# EAGLE board tp34 (EAGLE 6.6.0), part 1 of 2
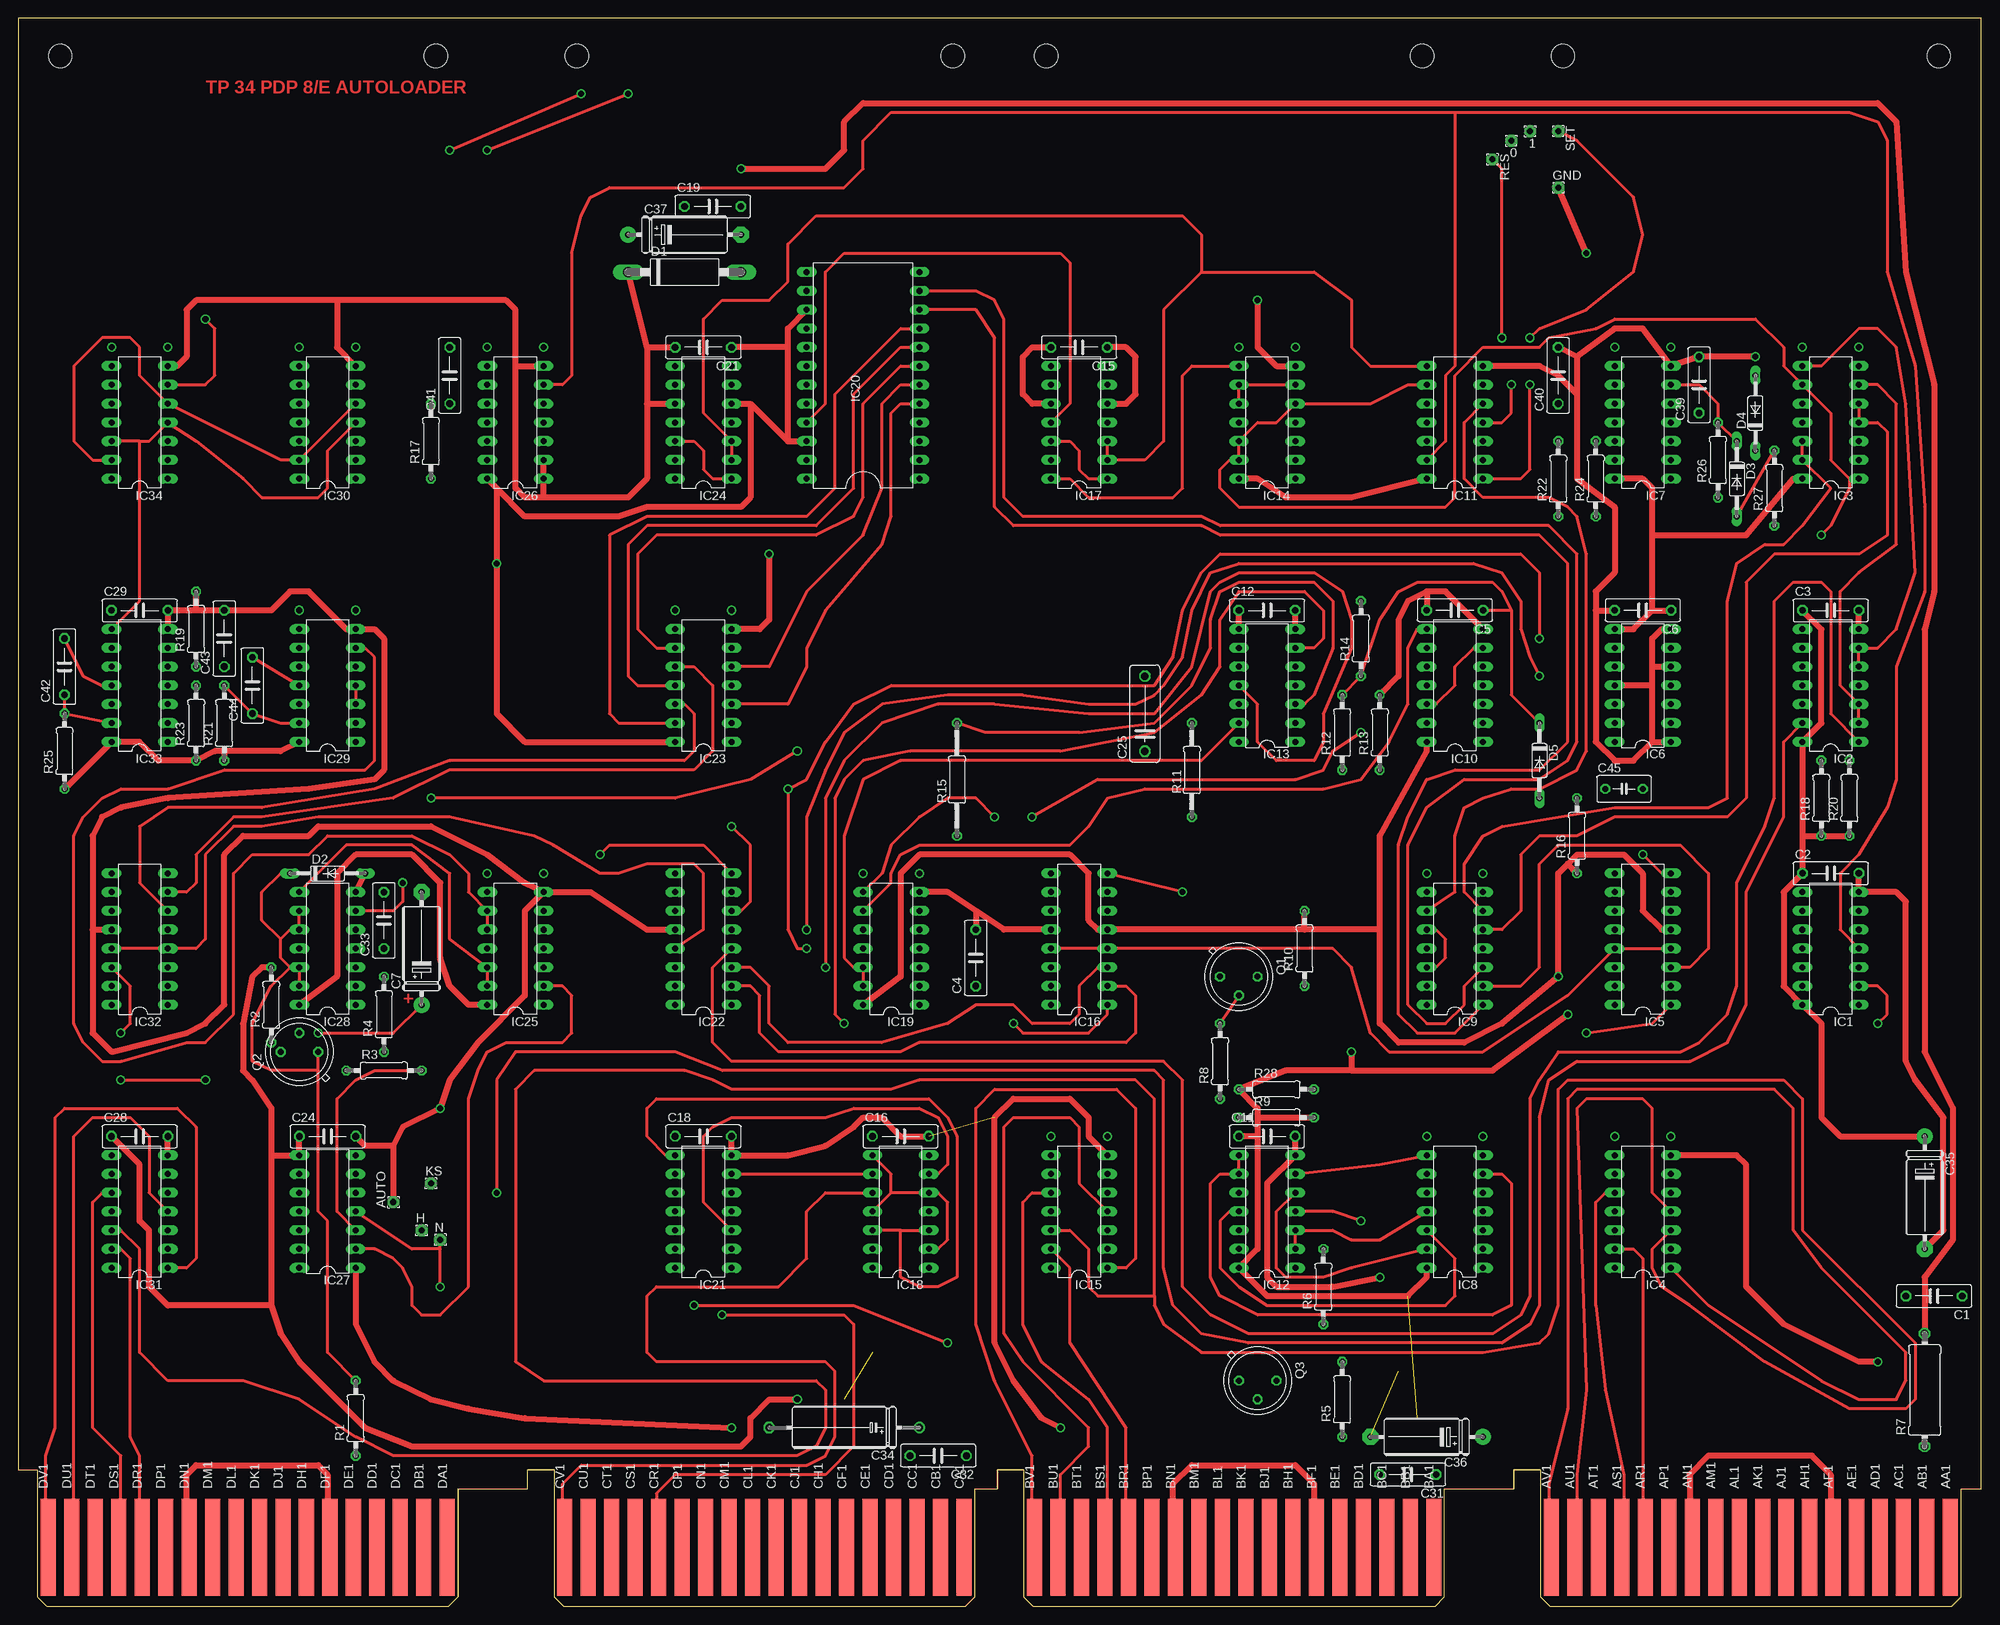
[diagram p0: board, top side]
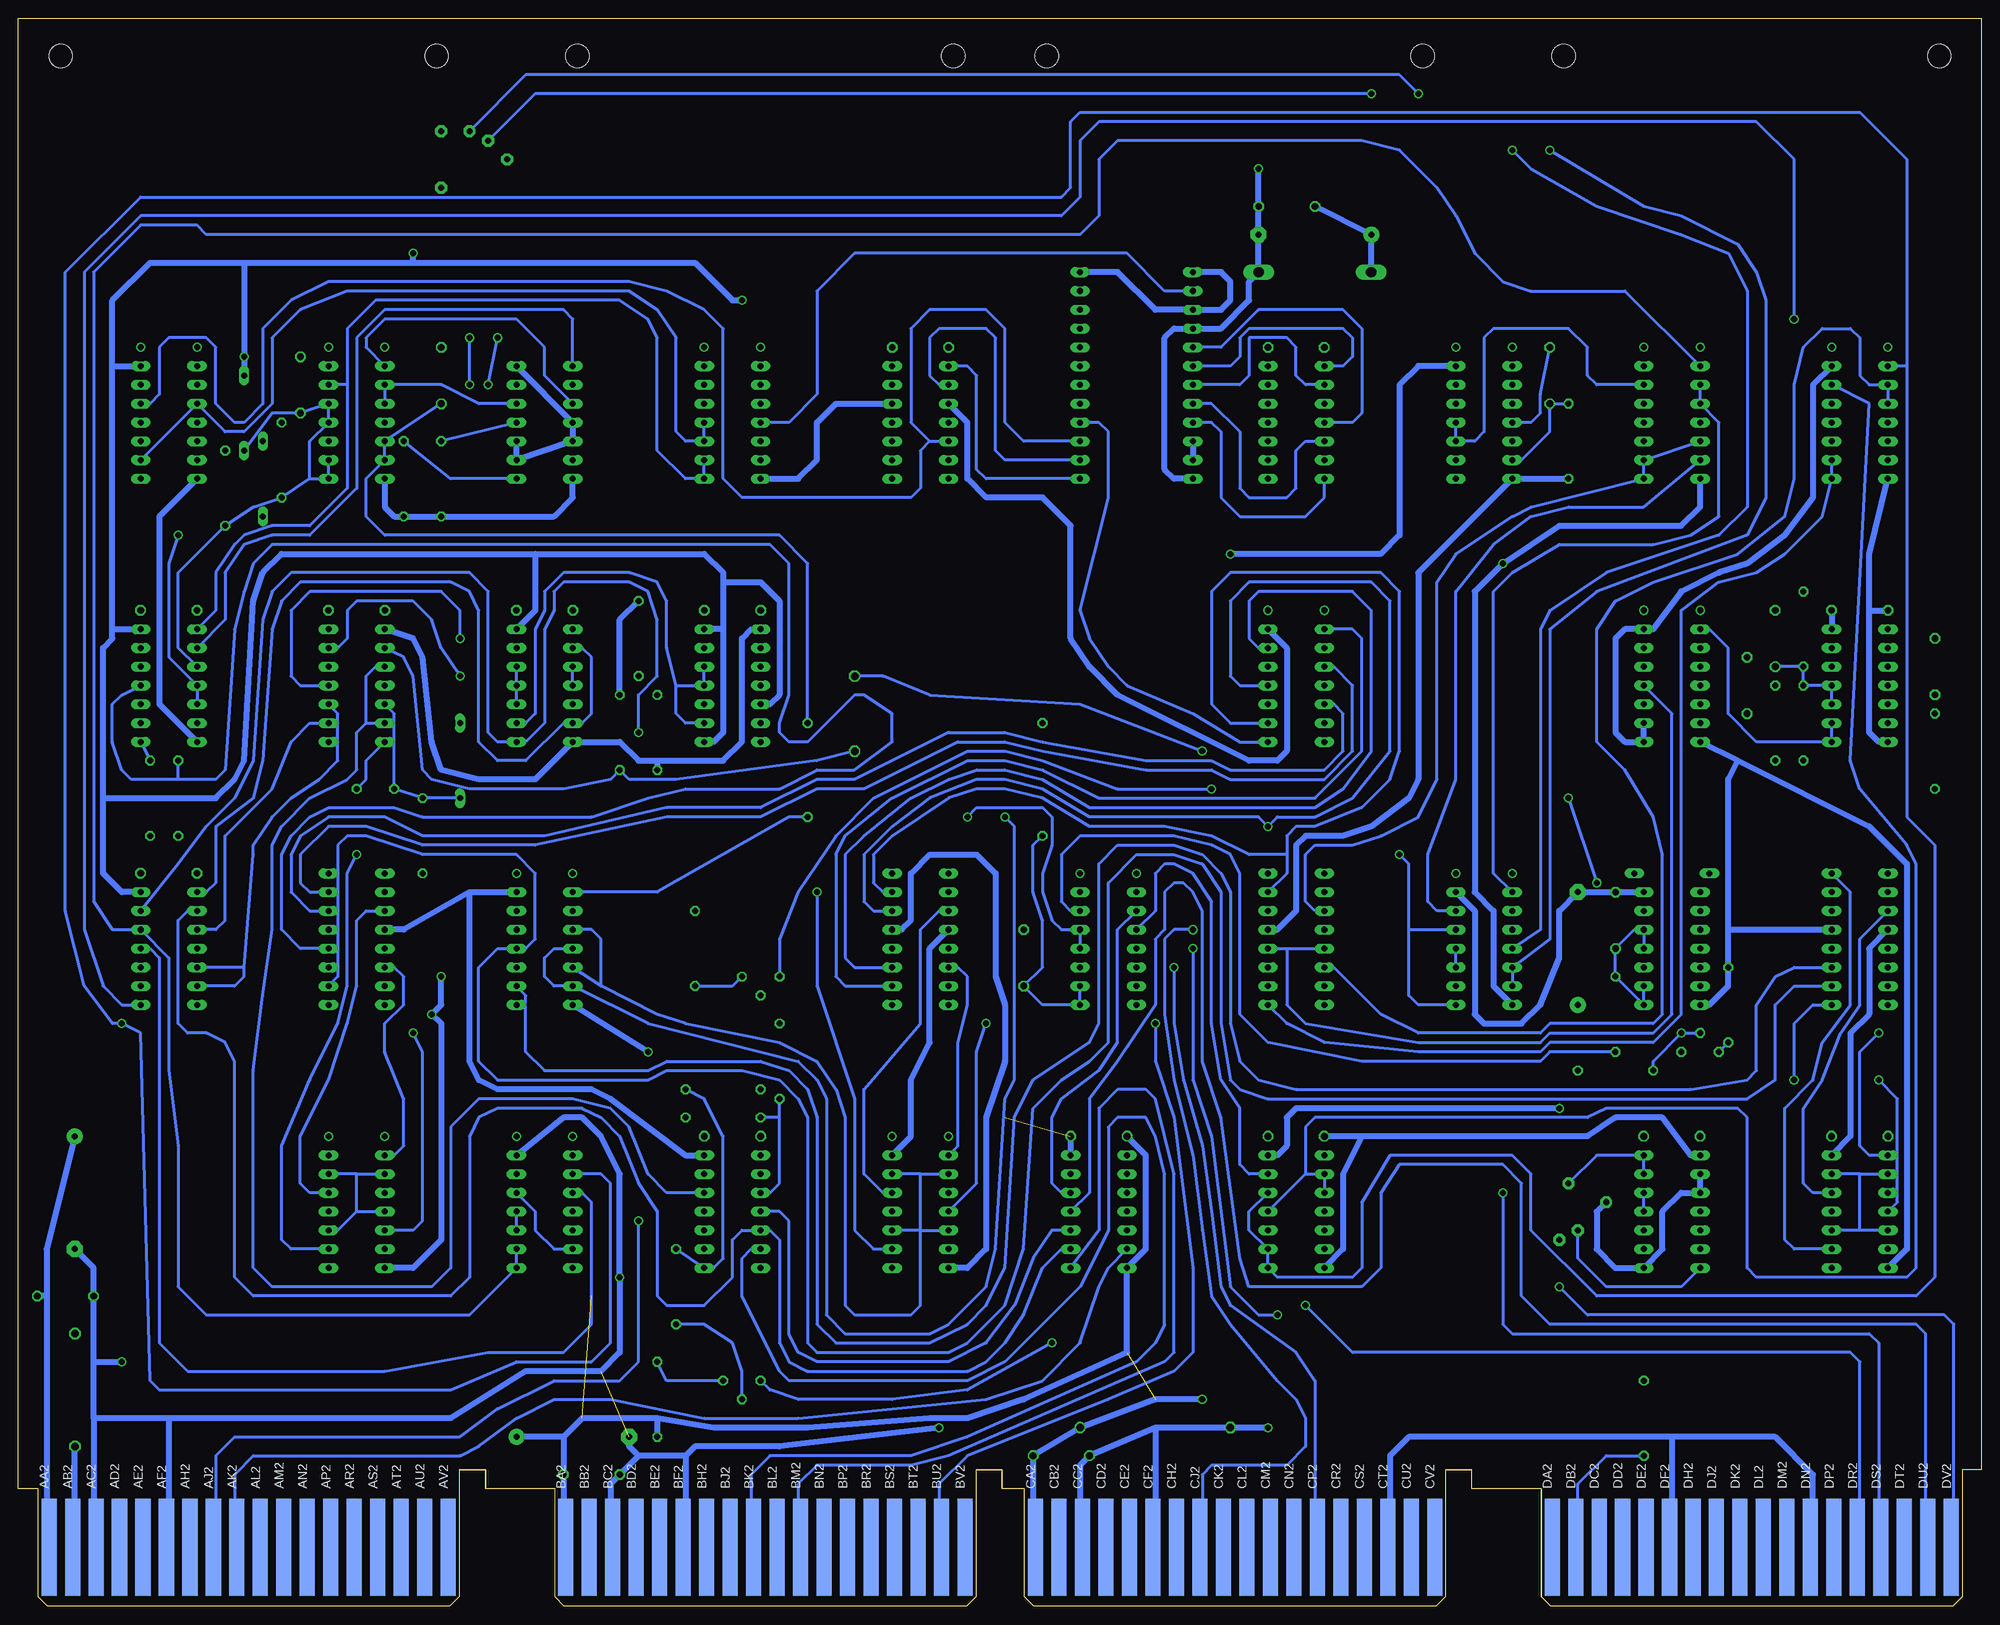
[diagram p1: board, bottom side, seen from below]

Size 265.3 x 214.63 mm. Coordinates in mm from the lower left corner, seen from the top.
Copper layers (1+16): Top 0.035mm / dielectric 1.5mm / Bottom 0.035mm
Design rules "16mils": minimum track width 16mil, minimum drill 32mil, track to track 15mil, track to pad 10mil, pad to pad 10mil, via to via 10mil, smd to smd 10mil, copper to edge 13mil, drill to drill 10mil, minimum pad ring 10mil, minimum via ring 8mil, stop-mask expansion 0mil, vias tented up to drill 0mil, thermal gap 10mil
Net classes: 1 supply: width 0.813 mm

## Footprints (pad centres in the part's own frame; a part is rotated, then mirrored left to right if it is on the bottom)
1,6/0,8 = drill 0.813 pad 1.6 octagon: 1 0,0
C075-032X103 = drill 0.914 octagon: 1 -3.81,0; 2 3.81,0
E15-5 = drill 0.813 pad 2.159: + -7.62,0 | drill 0.813 pad 2.159 octagon: - 7.62,0
C102-043X133 = drill 1.016 octagon: 1 -5.08,0; 2 5.08,0
E12-8 = drill 1.016: + -10.16,0 | drill 1.016 octagon: - 10.16,0
C050-035X075 = drill 0.813 octagon: 1 -2.54,0; 2 2.54,0
C1702-15 = drill 1.397 long: A 7.62,0; C -7.62,0
DO35-10 = drill 0.813 long: A 5.08,0; C -5.08,0
DIL14 = drill 0.813 long: 1 -7.62,-3.81; 2 -5.08,-3.81; 3 -2.54,-3.81; 4 0,-3.81; 5 2.54,-3.81; 6 5.08,-3.81; 7 7.62,-3.81; 8 7.62,3.81; 9 5.08,3.81; 10 2.54,3.81; 11 0,3.81; 12 -2.54,3.81; 13 -5.08,3.81; 14 -7.62,3.81
DIL16 = drill 0.813 long: 1 -8.89,-3.81; 2 -6.35,-3.81; 3 -3.81,-3.81; 4 -1.27,-3.81; 5 1.27,-3.81; 6 3.81,-3.81; 7 6.35,-3.81; 8 8.89,-3.81; 9 8.89,3.81; 10 6.35,3.81; 11 3.81,3.81; 12 1.27,3.81; 13 -1.27,3.81; 14 -3.81,3.81; 15 -6.35,3.81; 16 -8.89,3.81
DIL24 = drill 0.813 long: 1 -12.7,-7.62; 2 -10.16,-7.62; 3 -7.62,-7.62; 4 -5.08,-7.62; 5 -2.54,-7.62; 6 0,-7.62; 7 2.54,-7.62; 8 5.08,-7.62; 9 7.62,-7.62; 10 10.16,-7.62; 11 12.7,-7.62; 12 15.24,-7.62; 13 15.24,7.62; 14 12.7,7.62; 15 10.16,7.62; 16 7.62,7.62; 17 5.08,7.62; 18 2.54,7.62; 19 0,7.62; 20 -2.54,7.62; 21 -5.08,7.62; 22 -7.62,7.62; 23 -10.16,7.62; 24 -12.7,7.62
TO5 = drill 0.813 octagon: 1 0,-2.54; 2 2.54,0; 3 0,2.54
0207/10 = drill 0.813 octagon: 1 -5.08,0; 2 5.08,0
0414/15 = drill 1.016 octagon: 1 -7.62,0; 2 7.62,0
0207/12 = drill 0.813 octagon: 1 -6.35,0; 2 6.35,0
0207/15 = drill 0.813 octagon: 1 -7.62,0; 2 7.62,0
OMNIBUS = hole 3.175: 208.915,209.55; 259.715,209.55; 189.865,209.55; 139.065,209.55; 75.616,209.55; 126.416,209.55; 56.566,209.55; 5.766,209.55
EDGE-CON8 = smd 2.032 x 13.106: AA1 261.303,7.938; AB1 258.127,7.938; AC1 254.952,7.938; AD1 251.778,7.938; AE1 248.602,7.938; AF1 245.428,7.938; AH1 242.252,7.938; AJ1 239.077,7.938; AK1 235.903,7.938; AL1 232.727,7.938; AM1 229.553,7.938; AN1 226.377,7.938; AP1 223.202,7.938; AR1 220.028,7.938; AS1 216.852,7.938; AT1 213.678,7.938; AU1 210.502,7.938; AV1 207.327,7.938; BA1 191.452,7.938; BB1 188.278,7.938; BC1 185.102,7.938; BD1 181.928,7.938; BE1 178.752,7.938; BF1 175.577,7.938; BH1 172.403,7.938; BJ1 169.227,7.938; BK1 166.053,7.938; BL1 162.877,7.938; BM1 159.702,7.938; BN1 156.528,7.938; BP1 153.352,7.938; BR1 150.178,7.938; BS1 147.002,7.938; BT1 143.827,7.938; BU1 140.653,7.938; BV1 137.477,7.938; CA1 127.953,7.938; CB1 124.778,7.938; CC1 121.603,7.938; CD1 118.427,7.938; CE1 115.252,7.938; CF1 112.078,7.938; CH1 108.903,7.938; CJ1 105.728,7.938; CK1 102.552,7.938; CL1 99.377,7.938; CM1 96.203,7.938; CN1 93.028,7.938; CP1 89.853,7.938; CR1 86.677,7.938; CS1 83.502,7.938; CT1 80.328,7.938; CU1 77.153,7.938; CV1 73.978,7.938; DA1 58.102,7.938; DB1 54.928,7.938; DC1 51.752,7.938; DD1 48.578,7.938; DE1 45.403,7.938; DF1 42.227,7.938; DH1 39.053,7.938; DJ1 35.877,7.938; DK1 32.703,7.938; DL1 29.527,7.938; DM1 26.352,7.938; DN1 23.177,7.938; DP1 20.003,7.938; DR1 16.828,7.938; DS1 13.652,7.938; DT1 10.477,7.938; DU1 7.303,7.938; DV1 4.128,7.938 | smd 2.032 x 13.106 bottom: AA2 261.303,7.938; AB2 258.127,7.938; AC2 254.952,7.938; AD2 251.778,7.938; AE2 248.602,7.938; AF2 245.428,7.938; AH2 242.252,7.938; AJ2 239.077,7.938; AK2 235.903,7.938; AL2 232.727,7.938; AM2 229.553,7.938; AN2 226.377,7.938; AP2 223.202,7.938; AR2 220.028,7.938; AS2 216.852,7.938; AT2 213.678,7.938; AU2 210.502,7.938; AV2 207.327,7.938; BA2 191.452,7.938; BB2 188.278,7.938; BC2 185.102,7.938; BD2 181.928,7.938; BE2 178.752,7.938; BF2 175.577,7.938; BH2 172.403,7.938; BJ2 169.227,7.938; BK2 166.053,7.938; BL2 162.877,7.938; BM2 159.702,7.938; BN2 156.528,7.938; BP2 153.352,7.938; BR2 150.178,7.938; BS2 147.002,7.938; BT2 143.827,7.938; BU2 140.653,7.938; BV2 137.477,7.938; CA2 127.953,7.938; CB2 124.778,7.938; CC2 121.603,7.938; CD2 118.427,7.938; CE2 115.252,7.938; CF2 112.078,7.938; CH2 108.903,7.938; CJ2 105.728,7.938; CK2 102.552,7.938; CL2 99.377,7.938; CM2 96.203,7.938; CN2 93.028,7.938; CP2 89.853,7.938; CR2 86.677,7.938; CS2 83.502,7.938; CT2 80.328,7.938; CU2 77.153,7.938; CV2 73.978,7.938; DA2 58.102,7.938; DB2 54.928,7.938; DC2 51.752,7.938; DD2 48.578,7.938; DE2 45.403,7.938; DF2 42.227,7.938; DH2 39.053,7.938; DJ2 35.877,7.938; DK2 32.703,7.938; DL2 29.527,7.938; DM2 26.352,7.938; DN2 23.177,7.938; DP2 20.003,7.938; DR2 16.828,7.938; DS2 13.652,7.938; DT2 10.477,7.938; DU2 7.303,7.938; DV2 4.128,7.938

## Placement (x,y rotation side)
0  [1,6/0,8]  201.8,198.12 180 top
1  [1,6/0,8]  204.34,199.39 180 top
AUTO  [1,6/0,8]  50.67,54.61 90 top
C1  .01uF  [C075-032X103]  258.95,41.91 180 top
C2  .01uF  [C075-032X103]  244.98,99.06 0 top
C3  .01uF  [C075-032X103]  244.98,134.62 0 top
C4  .22uF  [C075-032X103]  129.41,87.63 90 top
C5  .01uF  [C075-032X103]  194.18,134.62 180 top
C6  .01uF  [C075-032X103]  219.58,134.62 180 top
C7  (not installed)  [E15-5]  54.48,88.9 90 top
C11  .01uF  [C075-032X103]  168.78,63.5 0 top
C12  .01uF  [C075-032X103]  168.78,134.62 0 top
C15  .01uF  [C075-032X103]  143.38,170.18 180 top
C16  .01uF  [C075-032X103]  119.25,63.5 0 top
C18  .01uF  [C075-032X103]  92.58,63.5 0 top
C19  .01uF  [C075-032X103]  93.85,189.23 0 top
C21  .01uF  [C075-032X103]  92.58,170.18 180 top
C24  .01uF  [C075-032X103]  41.78,63.5 0 top
C25  56pF  [C102-043X133]  152.27,120.65 90 top
C28  .01uF  [C075-032X103]  16.38,63.5 0 top
C29  .01uF  [C075-032X103]  16.38,134.62 0 top
C31  .01uF  [C075-032X103]  187.83,17.78 180 top
C32  .01uF  [C075-032X103]  124.33,20.32 180 top
C33  .01uF  [C075-032X103]  49.4,92.71 90 top
C34  22uF  [E12-8]  111.63,24.13 180 top
C35  25uF  [E15-5]  257.68,55.88 270 top
C36  25uF  [E15-5]  190.37,22.86 180 top
C37  25uF  [E15-5]  90.04,185.42 0 top
C39  .22uF  [C075-032X103]  227.2,165.1 90 top
C40  .01uF  [C075-032X103]  208.15,166.37 90 top
C41  1nF  [C075-032X103]  58.29,166.37 90 top
C42  1nF  [C075-032X103]  6.22,127 90 top
C43  .01uF  [C075-032X103]  27.81,130.81 90 top
C44  1nF  [C075-032X103]  31.62,124.46 90 top
C45  1nF  [C050-035X075]  217.04,110.49 0 top
D1  10V 1N4739  [C1702-15]  90.04,180.34 0 top
D2  1N4154  [DO35-10]  41.78,99.06 0 top
D3  1N4154  [DO35-10]  232.28,152.4 270 top
D4  1N4154  [DO35-10]  234.82,161.29 90 top
D5  1N4154  [DO35-10]  205.61,114.3 270 top
GND  [1,6/0,8]  208.15,191.77 0 top
H  [1,6/0,8]  54.48,50.8 0 top
IC1  7420N  [DIL14]  244.98,88.9 90 top
IC2  7401N  [DIL14]  244.98,124.46 90 top
IC3  7420N  [DIL14]  244.98,160.02 90 top
IC4  7401N  [DIL14]  219.58,53.34 90 top
IC5  7475N  [DIL16]  219.58,90.17 90 top
IC6  SP380N  [DIL14]  219.58,124.46 90 top
IC7  7413N  [DIL14]  219.58,160.02 90 top
IC8  7400N  [DIL14]  194.18,53.34 90 top
IC9  7404N  [DIL14]  194.18,88.9 90 top
IC10  7400N  [DIL14]  194.18,124.46 90 top
IC11  7474N  [DIL14]  194.18,160.02 90 top
IC12  7401N  [DIL14]  168.78,53.34 90 top
IC13  SP384N  [DIL14]  168.78,124.46 90 top
IC14  7400N  [DIL14]  168.78,160.02 90 top
IC15  7401N  [DIL14]  143.38,53.34 90 top
IC16  7475N  [DIL16]  143.38,90.17 90 top
IC17  7493N  [DIL14]  143.38,160.02 90 top
IC18  7401N  [DIL14]  119.25,53.34 90 top
IC19  7413N  [DIL14]  117.98,88.9 90 top
IC20  AM1702A  [DIL24]  114.17,165.1 90 top
IC21  7400N  [DIL14]  92.58,53.34 90 top
IC22  7475N  [DIL16]  92.58,90.17 90 top
IC23  7404N  [DIL14]  92.58,124.46 90 top
IC24  7493N  [DIL14]  92.58,160.02 90 top
IC25  7400N  [DIL14]  67.18,88.9 90 top
IC26  74122N  [DIL14]  67.18,160.02 90 top
IC27  SP380N  [DIL14]  41.78,53.34 90 top
IC28  7413N  [DIL14]  41.78,88.9 90 top
IC29  74122N  [DIL14]  41.78,124.46 90 top
IC30  7420N  [DIL14]  41.78,160.02 90 top
IC31  7401N  [DIL14]  16.38,53.34 90 top
IC32  7475N  [DIL16]  16.38,90.17 90 top
IC33  74122N  [DIL14]  16.38,124.46 90 top
IC34  7420N  [DIL14]  16.38,160.02 90 top
KS  [1,6/0,8]  55.75,57.15 0 top
N  [1,6/0,8]  57.02,49.53 0 top
Q1  2N3646  [TO5]  164.97,85.09 270 top
Q2  2N3646  [TO5]  37.97,74.93 90 top
Q3  2N3646  [TO5]  167.51,30.48 270 top
R1  3.9K  [0207/10]  45.59,25.4 90 top
R2  51  [0207/10]  34.16,81.28 90 top
R3  1K  [0207/10]  49.4,72.39 0 top
R4  150  [0207/10]  49.4,80.01 90 top
R5  27  [0207/10]  178.94,27.94 90 top
R6  27  [0207/10]  176.4,43.18 90 top
R7  120 2W  [0414/15]  257.68,29.21 90 top
R8  27  [0207/10]  162.43,73.66 90 top
R9  470  [0207/10]  170.05,66.04 0 top
R10  27  [0207/10]  173.86,88.9 90 top
R11  270  [0207/12]  158.62,113.03 90 top
R12  220  [0207/10]  178.94,118.11 90 top
R13  6.8K  [0207/10]  184.02,118.11 90 top
R14  680  [0207/10]  181.48,130.81 90 top
R15  220  [0207/15]  126.87,111.76 90 top
R16  1.8K  [0207/10]  210.69,104.14 90 top
R17  33K  [0207/10]  55.75,157.48 90 top
R18  1K  [0207/10]  243.71,109.22 90 top
R19  680  [0207/10]  24,132.08 90 top
R20  1K  [0207/10]  247.52,109.22 90 top
R21  33K  [0207/10]  27.81,119.38 90 top
R22  680  [0207/10]  208.15,152.4 90 top
R23  220  [0207/10]  24,119.38 90 top
R24  680  [0207/10]  213.23,152.4 90 top
R25  33K  [0207/10]  6.22,115.57 90 top
R26  390  [0207/10]  229.74,154.94 90 top
R27  120  [0207/10]  237.36,151.13 90 top
R28  470  [0207/10]  170.05,69.85 0 top
RES  [1,6/0,8]  199.26,195.58 270 top
SET  [1,6/0,8]  208.15,199.39 270 top
U$1  OUTLINE-OMNIBUS  [OMNIBUS]  -0.13,0 0 top
U$2  [EDGE-CON8]  -0.13,0 0 top

## Library data of the parts
0 1 AUTO GND H KS N RES SET = wirepad
C1-C7 C11 C12 C15 C16 C18 C19 C21 C24 C25 C28 C29 C31-C33 C35-C37 C39-C45 R1-R28 = rcl
C34 IC6 IC13 IC20 IC27 U$1 U$2 = dec-con
D1-D5 = diode
IC1-IC5 IC7-IC12 IC14-IC19 IC21-IC26 IC28-IC34 = 74xx-us
Q1-Q3 = transistor-npn

## Nets
!A0: IC3.12 IC3.13 IC9.6
!BRK_DATA_CONT: IC12.13 U$2.BK2
!CS: IC14.11 IC20.14
!D0: IC16.7 IC22.7 IC23.2
!D1: IC16.6 IC22.6 IC23.4
!D2: IC16.3 IC22.3 IC23.6
!D3: IC16.2 IC22.2 IC23.8
!D4: IC5.7 IC23.10 IC32.7
!D5: IC5.6 IC23.12 IC32.6
!D6: IC5.3 IC9.2 IC32.3
!D7: IC5.2 IC9.4 IC32.2
!DATA0: IC4.13 U$2.AR1
!DATA1: IC4.10 U$2.AS1
!DATA2: IC4.4 U$2.AU1
!DATA3: IC4.1 U$2.AV1
!DATA4: IC15.13 U$2.BR1
!DATA5: IC15.10 U$2.BS1
!DATA6: IC15.4 U$2.BU1
!DATA7: IC15.1 U$2.BV1
!DATA8: IC31.13 U$2.DR1
!DATA9: IC31.10 U$2.DS1
!DATA10: IC31.4 U$2.DU1
!DATA11: IC31.1 U$2.DV1
!DOF0: IC1.1 IC21.4 IC21.9 IC21.10 IC34.6
!DOF1: IC1.2 IC8.9 IC21.1 IC21.2 IC21.5 IC34.8
!DOF2: IC1.5 IC8.1 IC8.2 IC30.8
!INITIALIZE: IC1.12 IC1.13 IC6.3
!KEY_CONT: IC18.4 U$2.DU2
!LA_ENABLE: IC18.1 U$2.BM2
!MD_DIR: IC18.13 U$2.AK2
!MEM_START: IC12.4 U$2.AJ2
!MS_DISABLE: IC18.10 U$2.CV1
!RUN: IC13.6 U$2.BU2
!STOP: IC2.13 U$2.DS2
!TIMER1: IC25.9 IC25.10 IC29.6
!TIMER3: IC1.4 IC8.10 IC11.13 IC26.6
!TP4: IC1.10 IC6.2
!TS4: IC13.11 U$2.CP2
-15V: R1.1 U$2.DB2
A0: IC3.4 IC3.5 IC9.5 IC17.1 IC17.12 IC20.3
A1: IC17.9 IC20.2
A2: IC17.8 IC20.1
A3: IC17.11 IC20.21 IC24.14
A4: IC20.20 IC24.1 IC24.12
A5: IC20.19 IC24.9
A6: IC20.18 IC24.8
A7: IC20.17 IC24.11
BRUNL: IC13.3 R15.2
CLK: IC3.2 IC3.10 IC14.3 IC14.4
COUNTH: IC2.11 IC2.12 IC3.1 IC3.9 IC11.9 IC14.5 IC14.12 IC14.13
COUNTL: IC2.9 IC11.8 IC17.2 IC17.3 IC24.2 IC24.3
D0: IC20.4 IC23.1
D0F0: IC8.12 IC12.11 IC18.3 IC18.12 IC21.8
D1: IC20.5 IC23.3
D2: IC20.6 IC23.5
D3: IC20.7 IC23.9
D4: IC20.8 IC23.11
D5: IC20.9 IC23.13
D6: IC9.1 IC20.10
D7: IC9.3 IC20.11
DATA0: IC4.12 IC5.1
DATA1: IC4.8 IC5.14
DATA2: IC4.5 IC5.11
DATA3: IC4.2 IC5.8
DATA4: IC15.11 IC16.1
DATA5: IC15.8 IC16.14
DATA6: IC15.5 IC16.11
DATA7: IC15.2 IC16.8
DATA8: IC31.11 IC32.1
DATA9: IC31.8 IC32.14
DATA10: IC31.5 IC32.11
DATA11: IC31.2 IC32.8
DOF1: IC18.6 IC21.3
DOF2: IC8.3 IC8.4
DRIVE: IC1.9 IC10.8 IC12.12 IC18.2 IC18.5 IC18.8 IC18.11 IC19.9
EVEN: IC2.4 IC5.4 IC5.13 IC16.4 IC16.13 R18.2
F0: IC22.1 IC34.1 IC34.2
F0+F1: IC18.9 IC19.10 IC21.6
F0+F2+T3: IC1.6 IC10.1 IC19.4 IC19.5
F1: IC22.14 IC34.9 IC34.10
F1+T3: IC8.8 IC12.6
F2: IC22.11 IC30.1 IC30.2 IC30.12
F3: IC22.8 IC25.1 IC25.5
F3OK: IC25.6 IC30.5 IC30.13 IC34.5 IC34.13
GND [supply]: AUTO.1 C1.2 C2.2 C3.2 C4.2 C5.2 C6.2 C7.- C11.2 C12.2 C15.2 C16.2 C18.2 C19.1 C21.2 C24.2 C28.2 C29.2 C31.2 C32.2 C33.2 C34.- C35.- C36.- C37.+ C39.2 C40.2 C43.2 D1.C D2.A D4.A GND.1 IC1.7 IC2.7 IC3.7 IC4.7 IC5.12 IC6.1 IC6.5 IC6.7 IC6.11 IC7.7 IC8.7 IC9.7 IC10.7 IC11.2 IC11.3 IC11.7 IC11.11 IC11.12 IC12.7 IC13.1 IC13.7 IC13.12 IC14.7 IC15.7 IC16.12 IC17.10 IC18.7 IC19.7 IC21.7 IC22.12 IC23.7 IC24.10 IC25.7 IC26.1 IC26.2 IC26.7 IC27.1 IC27.9 IC27.10 IC28.7 IC29.1 IC29.2 IC29.7 IC30.7 IC31.7 IC32.12 IC33.7 IC34.7 R13.2 R14.2 R19.2 U$2.AC2 U$2.AF2 U$2.BC2 U$2.BF2 U$2.CC2 U$2.CF2
INITIALIZE: IC6.4 Q1.1 U$2.CR1
N$1 [supply]: U$2.AF1 U$2.AN1
N$2 [supply]: U$2.BF1 U$2.BN1
N$3 [supply]: U$2.DF1 U$2.DN1
N$4 [supply]: U$2.CT2 U$2.DF2 U$2.DN2
N$5: IC10.6 IC10.12
N$6: D2.C IC28.9 IC28.10 IC28.12 IC28.13 Q2.1 R1.2
N$7: IC2.2 IC2.3 IC3.6
N$9: IC2.5 IC2.6 IC3.8
N$11: D3.C IC2.8 IC7.6 IC14.1 IC14.2 R26.2
N$14: C25.2 IC28.6
N$17: D3.A R27.2
N$20: IC4.3 IC4.6 IC4.9 IC4.11 IC9.10 IC9.12 IC15.3 IC15.6 IC15.9 IC15.12 IC31.3 IC31.6 IC31.9 IC31.12
N$21: C39.1 D4.C IC2.10 IC7.1 IC7.2 IC7.4 IC7.5 R26.1 R27.1
N$22: C25.1 IC6.9 R13.1
N$23: C45.1 D5.A IC6.12 R16.2
N$24: C5.1 D5.C R12.2 R14.1
N$26: IC7.9 IC7.10 IC9.9 IC11.5
N$28: C45.2 IC6.14
N$38: IC1.8 IC10.9 IC10.13
N$44: 1.1 IC25.12 IC25.13 IC28.8
N$49: IC11.4 R22.2 RES.1
N$50: IC11.1 R24.2 SET.1
N$57: 0.1 IC25.11
N$64: C42.1 IC33.13 R25.2
N$65: C42.2 IC33.11
N$67: C43.1 IC33.3 IC33.4 R19.1 R23.2
N$74: C44.1 IC29.13 R21.2
N$75: C40.1 IC7.12 IC7.13 R11.2
N$84: IC7.8 IC11.10
N$85: C44.2 IC29.11
N$94: IC8.11 IC12.2 IC12.3
N$96: IC8.6 IC12.8 IC12.9
N$99: IC9.11 IC9.13 IC19.8
N$107: IC9.8 R11.1
N$110: IC10.3 IC10.4 IC10.5
N$116: IC10.10 IC10.11
N$134: IC12.1 R6.2 R28.2
N$143: IC12.10 R8.1 R9.1
N$159: C7.+ Q2.2 R3.1
N$163: IC14.6 IC14.9 IC14.10
N$167: IC14.8 IC17.14
N$169: Q1.3 R10.1
N$171: Q1.2 R8.2
N$173: Q2.3 R2.1
N$205: C4.1 IC19.1 IC19.2 R15.1
N$222: IC19.6 R4.1
N$223: C41.1 IC26.13 R17.2
N$231: C33.1 IC28.1 IC28.2 IC28.4 IC28.5 R4.2
N$234: C41.2 IC26.11
N$237: Q3.3 R5.2
N$238: Q3.2 R6.1
N$240 [supply]: R7.1 U$2.AB2
N$300: IC25.3 IC25.4
N$302: IC25.2 IC27.2
N$315: IC26.3 IC26.4 IC30.6
N$325: IC27.6 IC27.7 KS.1
N$331: H.1 IC27.14
N$344: IC29.8 IC33.1 IC33.2
ODD: IC2.1 IC22.4 IC22.13 IC29.3 IC29.4 IC32.4 IC32.13 R20.2
PULSE: IC6.10 IC6.13 IC8.5 IC8.13 IC12.5
PULSE_LA: Q3.1 U$2.DR2
RUNL: IC10.2 IC13.2 IC13.4 IC13.5
SWITCH: IC27.4 IC27.5 N.1 U$2.DV2
SWITCHL: IC27.3 R3.2
TIMER1: IC25.8 IC30.9 IC30.10
TIMER2: IC30.4 IC33.8 IC34.4 IC34.12
TP4: IC6.6 U$2.CJ2
TS4L: IC13.13 IC19.12 IC19.13
VCC [supply]: C1.1 C2.1 C3.1 C6.1 C11.1 C12.1 C15.1 C16.1 C18.1 C21.1 C24.1 C28.1 C29.1 C31.1 C32.1 C34.+ C35.+ C36.+ IC1.14 IC2.14 IC3.14 IC4.14 IC5.5 IC6.8 IC7.14 IC8.14 IC9.14 IC10.14 IC11.14 IC12.14 IC13.8 IC14.14 IC15.14 IC16.5 IC17.5 IC18.14 IC19.14 IC20.12 IC20.13 IC20.15 IC20.22 IC20.23 IC21.14 IC22.5 IC23.14 IC24.5 IC25.14 IC26.14 IC27.8 IC28.14 IC29.14 IC30.14 IC31.14 IC32.5 IC33.14 IC34.14 R2.2 R5.1 R9.2 R10.2 R12.1 R16.1 R17.1 R18.1 R20.1 R21.1 R22.1 R23.1 R24.1 R25.1 R28.1 U$2.AA2 U$2.BA2 U$2.CA2
VDD: C19.2 C37.- D1.A IC20.16 IC20.24 R7.2